# Altium PCB PCB1.PcbDoc (part 2 of 2)
Units mil, origin at the board's own origin, x right, y up, seen from the top; angles counter-clockwise.
Board outline 2920 x 2425 mil, 2 copper layers (Top Layer, Bottom Layer); 160 components, 43 nets, 660 pads, 172 vias.
Unrouted connection lines stored in the file: 5.
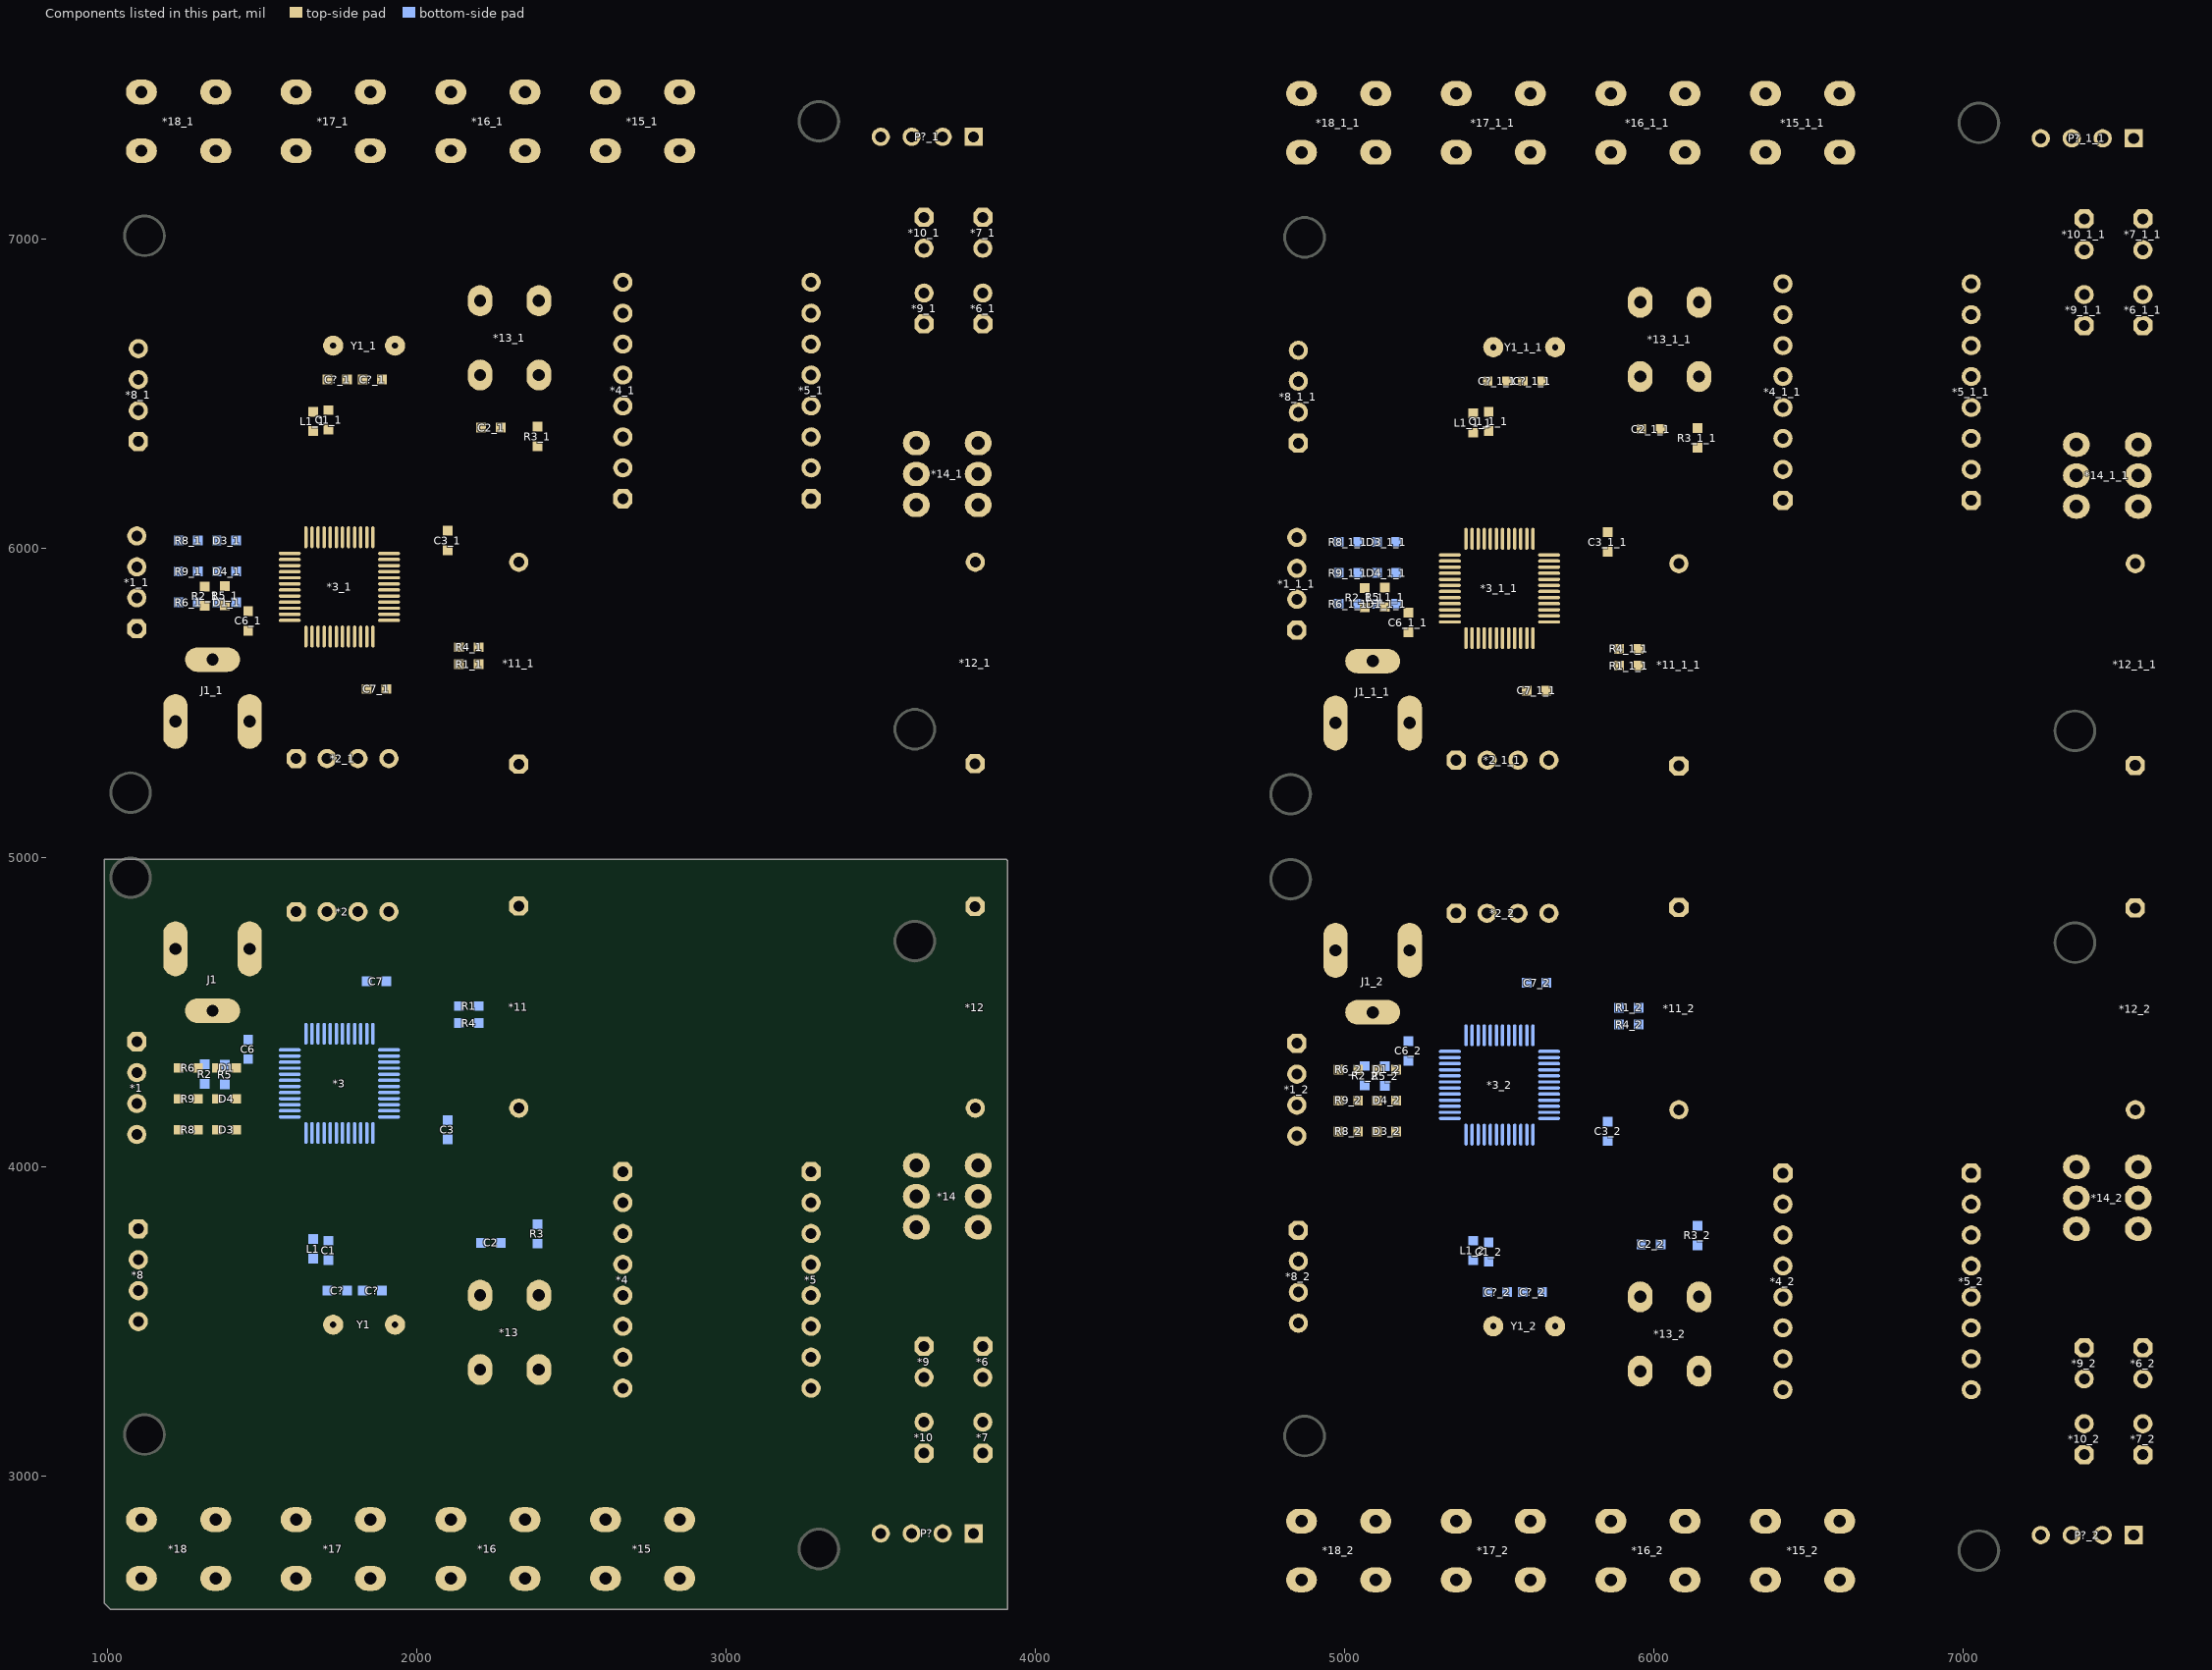
[diagram p2: the components of this part, seen from the top]

## Via types
v1: diameter 43.31, hole 17.72, Top Layer to Bottom Layer, 132 vias
v2: diameter 50, hole 28, Top Layer to Bottom Layer, 24 vias
v3: diameter 35.43, hole 17.72, Top Layer to Bottom Layer, 12 vias
v4: diameter 30.87, hole 17.72, Top Layer to Bottom Layer, 4 vias

## Nets (pads, with @x,y where several pads share a name; then routed paths per layer and width w, separated by ;. In a path a pad name is that pad's centre, name@x,y a point inside that pad or via, vN(x,y) a via of type N, cw(c..) or ccw(c..) an arc to the next point about the centre after c; other vN are vias at no path point) (continued)
pads on no net: *1_1.1 *1_1.2 *1_1.3 *1_1.4 *1_1_1.1 *1_1_1.2 *1_1_1.3 *1_1_1.4 *1_2.1 *1_2.2 *1_2.3 *1_2.4 *2_1.1 *2_1.2 *2_1.3 *2_1.4 *2_1_1.1 *2_1_1.2 *2_1_1.3 *2_1_1.4 *2_2.1 *2_2.2 *2_2.3 *2_2.4 *3.1 *3.2 *3.3 *3.4 *3.10 *3.11 *3.25 *3.26 *3.29 *3.32 *3.33 *3.38 *3_1.1 *3_1.2 *3_1.3 *3_1.4 *3_1.5 *3_1.6 *3_1.7 *3_1.8 *3_1.9 *3_1.10 *3_1.11 *3_1.12 *3_1.13 *3_1.14 *3_1.15 *3_1.16 *3_1.17 *3_1.18 *3_1.19 *3_1.20 *3_1.21 *3_1.22 *3_1.23 *3_1.24 *3_1.25 *3_1.26 *3_1.27 *3_1.28 *3_1.29 *3_1.30 *3_1.31 *3_1.32 *3_1.33 *3_1.34 *3_1.35 *3_1.36 *3_1.37 *3_1.38 *3_1.39 *3_1.40 *3_1.41 *3_1.42 *3_1.43 *3_1.44 *3_1.45 *3_1.46 *3_1.47 *3_1.48 *3_1_1.1 *3_1_1.2 *3_1_1.3 *3_1_1.4 *3_1_1.5 *3_1_1.6 *3_1_1.7 *3_1_1.8 *3_1_1.9 *3_1_1.10 *3_1_1.11 *3_1_1.12 *3_1_1.13 *3_1_1.14 *3_1_1.15 *3_1_1.16 *3_1_1.17 *3_1_1.18 *3_1_1.19 *3_1_1.20 *3_1_1.21 *3_1_1.22 *3_1_1.23 *3_1_1.24 *3_1_1.25 *3_1_1.26 *3_1_1.27 *3_1_1.28 *3_1_1.29 *3_1_1.30 *3_1_1.31 *3_1_1.32 *3_1_1.33 *3_1_1.34 *3_1_1.35 *3_1_1.36 *3_1_1.37 *3_1_1.38 *3_1_1.39 *3_1_1.40 *3_1_1.41 *3_1_1.42 *3_1_1.43 *3_1_1.44 *3_1_1.45 *3_1_1.46 *3_1_1.47 *3_1_1.48 *3_2.1 *3_2.2 *3_2.3 *3_2.4 *3_2.5 *3_2.6 *3_2.7 *3_2.8 *3_2.9 *3_2.10 *3_2.11 *3_2.12 *3_2.13 *3_2.14 *3_2.15 *3_2.16 *3_2.17 *3_2.18 *3_2.19 *3_2.20 *3_2.21 *3_2.22 *3_2.23 *3_2.24 *3_2.25 *3_2.26 *3_2.27 *3_2.28 *3_2.29 *3_2.30 *3_2.31 *3_2.32 *3_2.33 *3_2.34 *3_2.35 *3_2.36 *3_2.37 *3_2.38 *3_2.39 *3_2.40 *3_2.41 *3_2.42 *3_2.43 *3_2.44 *3_2.45 *3_2.46 *3_2.47 *3_2.48 *4_1.1 *4_1.2 *4_1.3 *4_1.4 *4_1.5 *4_1.6 *4_1.7 *4_1.8 *4_1_1.1 *4_1_1.2 *4_1_1.3 *4_1_1.4 *4_1_1.5 *4_1_1.6 *4_1_1.7 *4_1_1.8 *4_2.1 *4_2.2 *4_2.3 *4_2.4 *4_2.5 *4_2.6 *4_2.7 *4_2.8 *5_1.1 *5_1.2 *5_1.3 *5_1.4 *5_1.5 *5_1.6 *5_1.7 *5_1.8 *5_1_1.1 *5_1_1.2 *5_1_1.3 *5_1_1.4 *5_1_1.5 *5_1_1.6 *5_1_1.7 *5_1_1.8 *5_2.1 *5_2.2 *5_2.3 *5_2.4 *5_2.5 *5_2.6 *5_2.7 *5_2.8 *6_1.1 *6_1.2 *6_1_1.1 *6_1_1.2 *6_2.1 *6_2.2 *7_1.1 *7_1.2 *7_1_1.1 *7_1_1.2 *7_2.1 *7_2.2 *8_1.1 *8_1.2 *8_1.3 *8_1.4 *8_1_1.1 *8_1_1.2 *8_1_1.3 *8_1_1.4 *8_2.1 *8_2.2 *8_2.3 *8_2.4 *9_1.1 *9_1.2 *9_1_1.1 *9_1_1.2 *9_2.1 *9_2.2 *10_1.1 *10_1.2 *10_1_1.1 *10_1_1.2 *10_2.1 *10_2.2 *11_1.1 *11_1.2 *11_1_1.1 *11_1_1.2 *11_2.1 *11_2.2 *12_1.1 *12_1.2 *12_1_1.1 *12_1_1.2 *12_2.1 *12_2.2 *13_1.1 *13_1.2 *13_1_1.1 *13_1_1.2 *13_2.1 *13_2.2 *14.1 *14.2 *14.3 *14.4 *14_1.1 *14_1.2 *14_1.3 *14_1.4 *14_1.5 *14_1.6 *14_1_1.1 *14_1_1.2 *14_1_1.3 *14_1_1.4 *14_1_1.5 *14_1_1.6 *14_2.1 *14_2.2 *14_2.3 *14_2.4 *14_2.5 *14_2.6 *15_1.1 *15_1.2 *15_1_1.1 *15_1_1.2 *15_2.1 *15_2.2 *16_1.1 *16_1.2 *16_1_1.1 *16_1_1.2 *16_2.1 *16_2.2 *17_1.1 *17_1.2 *17_1_1.1 *17_1_1.2 *17_2.1 *17_2.2 *18_1.1 *18_1.2 *18_1_1.1 *18_1_1.2 *18_2.1 *18_2.2 C1_1.1 C1_1.2 C1_1_1.1 C1_1_1.2 C1_2.1 C1_2.2 C2_1.1 C2_1.2 C2_1_1.1 C2_1_1.2 C2_2.1 C2_2.2 C3_1.1 C3_1.2 C3_1_1.1 C3_1_1.2 C3_2.1 C3_2.2 C6_1.1 C6_1.2 C6_1_1.1 C6_1_1.2 C6_2.1 C6_2.2 C7_1.1 C7_1.2 C7_1_1.1 C7_1_1.2 C7_2.1 C7_2.2 C?_1.1 C?_1.2 C?_1_1.1 C?_1_1.2 C?_2.1 C?_2.2 D1_1.1 D1_1.2 D1_1_1.1 D1_1_1.2 D1_2.1 D1_2.2 D3_1.1 D3_1.2 D3_1_1.1 D3_1_1.2 D3_2.1 D3_2.2 D4_1.1 D4_1.2 D4_1_1.1 D4_1_1.2 D4_2.1 D4_2.2 J1_1.1 J1_1.2 J1_1.3 J1_1_1.1 J1_1_1.2 J1_1_1.3 J1_2.1 J1_2.2 J1_2.3 L1_1.1 L1_1.2 L1_1_1.1 L1_1_1.2 L1_2.1 L1_2.2 P?_1.1 P?_1.2 P?_1.3 P?_1.4 P?_1_1.1 P?_1_1.2 P?_1_1.3 P?_1_1.4 P?_2.1 P?_2.2 P?_2.3 P?_2.4 R1_1.1 R1_1.2 R1_1_1.1 R1_1_1.2 R1_2.1 R1_2.2 R2_1.1 R2_1.2 R2_1_1.1 R2_1_1.2 R2_2.1 R2_2.2 R3_1.1 R3_1.2 R3_1_1.1 R3_1_1.2 R3_2.1 R3_2.2 R4_1.1 R4_1.2 R4_1_1.1 R4_1_1.2 R4_2.1 R4_2.2 R5_1.1 R5_1.2 R5_1_1.1 R5_1_1.2 R5_2.1 R5_2.2 R6_1.1 R6_1.2 R6_1_1.1 R6_1_1.2 R6_2.1 R6_2.2 R8_1.1 R8_1.2 R8_1_1.1 R8_1_1.2 R8_2.1 R8_2.2 R9_1.1 R9_1.2 R9_1_1.1 R9_1_1.2 R9_2.1 R9_2.2 Y1_1.1 Y1_1.2 Y1_1_1.1 Y1_1_1.2 Y1_2.1 Y1_2.2
copper on no net: | length 201589.3
  Top Layer w10: 1095,5840 v1(1180,5755) ; 1095,5940 1095,5925 v1(1250,5770) ; 1100,6445 v2(1295,6445) ; 1100,6545 1105,6550 v2(1355,6550) ; 1245,5845 1350,5845 1380,5815 ; 1315,5876.5 1378.5,5876.5 1380,5877.99 1380,5870 1405,5845 1405.47,5845.47 1589.55,5845.47 ; 1350,7285 1350,7270 1450,7170 1450,5950 1495.16,5904.84 1505.47,5904.84 ; v1(1410,5975) 1410,5960 1416.5,5953.5 1426.9,5943.1 1426.9,5940.43 1482.18,5885.16 1485.16,5885.16 ; v1(1440,5880) 1454.84,5865.16 1589.55,5865.16 ; 1455,5737.01 1484.72,5766.73 1589.55,5766.73 ; 1455,5800 1468.58,5786.42 1589.55,5786.42 ; 1485.16,5884.84 1589.55,5884.84 ; 1505.47,5904.53 1589.55,5904.53 ; v4(1510,5815) 1520.79,5825.79 1589.55,5825.79 ; 1526.42,5963.58 1589.55,5963.58 ; 1526.42,5963.9 1525.33,5963.9 1515,5974.23 1515,7125 1565,7175 2500,7175 2610,7285 ; 1560,6012.82 1589.55,5983.27 ; 1589.55,5924.21 1500.79,5924.21 1475,5953.28 1475,7175 1585,7285 1610,7285 ; 1589.55,5943.9 1517.05,5943.9 1495,5965.95 1495,7140 1560,7205 2030,7205 2110,7285 ; 1605,6140 1640.92,6104.08 1640.92,6035.45 ; 1610,5320 1681.1,5391.1 1681.1,5714.55 ; 1675,6372.01 1665,6362.01 1665,6203.16 1694.82,6173.35 1694.94,6173.35 1698.28,6170 1700.79,6167.5 1700.79,6035.45 1700.79,6026.24 ; 1700.79,5714.55 1700.79,5329.21 1710,5320 ; v1(1710,6210) 1710,6195 1710.05,6194.95 1719.98,6185.08 1720.47,6035.45 ; 1730,6655 1765,6655 1796.65,6623.35 1796.65,6569.36 1794.25,6566.96 1794.25,6555.98 1794.25,6523.04 1796.65,6520.64 1796.65,6311.65 1765.7,6280.7 1765.7,6249.3 1775,6240 1775,6175 1760.16,6160.16 1760.16,6159.84 ; v3(1740.16,5600) 1740.16,5714.55 ; 1740.16,6035.45 1740.16,6170.16 1750,6180 1750,6235.16 1740.16,6245 1740.16,6290.16 1760,6310 v1(1760,6335) ; 1759.84,5714.55 1759.84,5650.16 v3(1770,5640) ; 1759.84,6035.45 1759.84,6159.84 ; 1779.53,6035.45 1779.53,6144.53 ; 1779.84,6144.53 1779.84,6144.84 1795,6160 1795,6248.28 1785.7,6257.58 1785.7,6272.42 1816.65,6303.37 1816.65,6631.65 1840,6655 1930,6655 ; v3(1805,5605) 1818.9,5618.9 1818.9,5714.55 ; 1838.5,5545 1838.58,5545.08 1838.58,5714.55 ; 1858.27,5714.55 1858.27,5588.23 1901.5,5545 ; v1(1865,6260) 1870,6255 v1(1870,6110) ; 1910.45,5766.73 1998.27,5766.73 2000,5765 v1(2065.08,5763.58) ; 1910.45,5806.1 2486.1,5806.1 2620,5940 2621.1,5941.1 2621.1,6114.72 2666.38,6160 ; 1910.45,5825.79 2460.79,5825.79 2590,5955 2590,6235 2615,6260 2666.38,6260 ; 1910.45,5845.47 2425.47,5845.47 2565,5985 2565,6335 2590,6360 2666.38,6360 ; 1910.45,5865.16 2390.16,5865.16 2535,6010 2535,6405 2590,6460 2666.38,6460 ; 1910.45,5884.84 2364.84,5884.84 2505,6025 2505,6500 2565,6560 2666.38,6560 ; 1910.45,5904.53 2156.97,5904.53 2157.44,5905 2178.5,5905 2203.5,5930 v1(2225,5930) ; 1910.45,5924.21 2129.21,5924.21 ; 1910.45,5943.9 2133.9,5943.9 ; 1910.45,5963.58 2065.08,5963.58 2095,5993.5 ; 1910.45,5983.27 2021.77,5983.27 2095,6056.5 ; v1(2055,6295) 2060,6295 2075,6280 v1(2075,6105) ; 2129.21,5924.53 2148.68,5924.53 2149.16,5925 2150,5925 2480,6255 2480,6570 2570,6660 2666.38,6660 ; 2133.9,5944.53 2134.53,5944.53 2460,6270 2460,6690 2530,6760 2666.38,6760 ; 2200,5625 2200,5680 v1(2200,5725) ; v1(2270,6335) 2271.5,6336.5 2271.5,6390 2387.01,6390 2390,6392.99 2390,6555 2395,6560 ; 4845,5835 v1(4930,5750) ; 4845,5935 4845,5920 v1(5000,5765) ; 4850,6440 v2(5045,6440) ; 4850,6540 4855,6545 v2(5105,6545) ; v1(4930,4385) 4932.5,4385 4957.5,4410 5230,4410 5360,4540 v3(5490.16,4540) ; 4995,5840 5100,5840 5130,5810 ; v1(5000,4370) 5020,4390 5250,4390 5360,4500 v3(5520,4500) ; 5042.99,4115 5103.5,4115 ; 5042.99,4215 5103.5,4215 ; 5042.99,4315 5103.5,4315 ; v2(5045,3695) 5045,3835 5090,3880 v1(5615,3880) ; 5065,5871.5 5128.5,5871.5 5130,5872.99 5130,5865 5155,5840 5155.47,5840.47 5339.55,5840.47 ; 5100,7280 5100,7265 5200,7165 5200,5945 5245.16,5899.84 5255.47,5899.84 ; v2(5105,3590) 5105,3800 5150,3845 v1(5805,3845) ; v1(5160,5970) 5160,5955 5166.5,5948.5 5176.9,5938.1 5176.9,5935.43 5232.18,5880.16 5235.16,5880.16 ; 5166.5,4115 5160,4121.5 v1(5160,4165) 5162.5,4165 v1@5166.5,4169 ; 5166.5,4215 5166.5,4246.5 v1@5180,4260 ; 5166.5,4315 5240,4315 v4@5250,4325 ; v1(5190,5875) 5204.84,5860.16 5339.55,5860.16 ; 5205,5732.01 5234.72,5761.73 5339.55,5761.73 ; 5205,5795 5218.58,5781.42 5339.55,5781.42 ; 5235.16,5879.84 5339.55,5879.84 ; 5255.47,5899.53 5339.55,5899.53 ; v4(5260,5810) 5270.79,5820.79 5339.55,5820.79 ; 5276.42,5958.58 5339.55,5958.58 ; 5276.42,5958.9 5275.33,5958.9 5265,5969.23 5265,7120 5315,7170 6250,7170 6360,7280 ; 5310,6007.82 5339.55,5978.27 ; 5339.55,5919.21 5250.79,5919.21 5225,5948.28 5225,7170 5335,7280 5360,7280 ; 5339.55,5938.9 5267.05,5938.9 5245,5960.95 5245,7135 5310,7200 5780,7200 5860,7280 ; 5355,6135 5390.92,6099.08 5390.92,6030.45 ; 5360,5315 5431.1,5386.1 5431.1,5709.55 ; 5425,6367.01 5415,6357.01 5415,6198.16 5444.82,6168.35 5444.94,6168.35 5448.28,6165 5450.79,6162.5 5450.79,6030.45 5450.79,6021.24 ; 5450.79,5709.55 5450.79,5324.21 5460,5315 ; v1(5460,6205) 5460,6190 5460.05,6189.95 5469.98,6180.08 5470.47,6030.45 ; 5480,6650 5515,6650 5546.65,6618.35 5546.65,6564.36 5544.25,6561.96 5544.25,6550.98 5544.25,6518.04 5546.65,6515.64 5546.65,6306.65 5515.7,6275.7 5515.7,6244.3 5525,6235 5525,6170 5510.16,6155.16 5510.16,6154.84 ; v3(5490.16,5595) 5490.16,5709.55 ; 5490.16,6030.45 5490.16,6165.16 5500,6175 5500,6230.16 5490.16,6240 5490.16,6285.16 5510,6305 v1(5510,6330) ; 5509.84,5709.55 5509.84,5645.16 v3(5520,5635) ; 5509.84,6030.45 5509.84,6154.84 ; v1(5510,3805) v1(6020,3805) ; 5529.53,6030.45 5529.53,6139.53 ; 5529.84,6139.53 5529.84,6139.84 5545,6155 5545,6243.28 5535.7,6252.58 5535.7,6267.42 5566.65,6298.37 5566.65,6626.65 5590,6650 5680,6650 ; v3(5555,4535) 5580,4535 5620,4495 v1(5620,4030) ; v3(5555,5600) 5568.9,5613.9 5568.9,5709.55 ; 5588.5,5540 5588.58,5540.08 5588.58,5709.55 ; 5608.27,5709.55 5608.27,5583.23 5651.5,5540 ; v1(5615,6255) 5620,6250 v1(5620,6105) ; 5660.45,5761.73 5748.27,5761.73 5750,5760 v1(5815.08,5758.58) ; 5660.45,5801.1 6236.1,5801.1 6370,5935 6371.1,5936.1 6371.1,6109.72 6416.38,6155 ; 5660.45,5820.79 6210.79,5820.79 6340,5950 6340,6230 6365,6255 6416.38,6255 ; 5660.45,5840.47 6175.47,5840.47 6315,5980 6315,6330 6340,6355 6416.38,6355 ; 5660.45,5860.16 6140.16,5860.16 6285,6005 6285,6400 6340,6455 6416.38,6455 ; 5660.45,5879.84 6114.84,5879.84 6255,6020 6255,6495 6315,6555 6416.38,6555 ; 5660.45,5899.53 5906.97,5899.53 5907.44,5900 5928.5,5900 5953.5,5925 v1(5975,5925) ; 5660.45,5919.21 5879.21,5919.21 ; 5660.45,5938.9 5883.9,5938.9 ; 5660.45,5958.58 5815.08,5958.58 5845,5988.5 ; 5660.45,5978.27 5771.77,5978.27 5845,6051.5 ; v1(5805,6290) 5810,6290 5825,6275 v1(5825,6100) ; v1(5815.08,4376.42) 5825,4366.5 v1(5825,4035) ; 5879.21,5919.53 5898.68,5919.53 5899.16,5920 5900,5920 6230,6250 6230,6565 6320,6655 6416.38,6655 ; 5883.9,5939.53 5884.53,5939.53 6210,6265 6210,6685 6280,6755 6416.38,6755 ; v1@5950,4420 v1(5950,4415) 5975,4390 v1(5975,4210) ; 5950,5620 5950,5675 v1(5950,5720) ; v1(6020,6330) 6021.5,6331.5 6021.5,6385 6137.01,6385 6140,6387.99 6140,6550 6145,6555
  Top Layer w20: 1095,5740 1135.63,5699.37 1315,5699.37 ; 1095,6040 1165,6040 1170,6045 ; 1100,6345 1210,6345 1230,6325 v1(1230,6135) ; v1@1170,6135 1170,6045 ; 1245,5845 1170,5920 1170,6045 ; 1315,5813.5 1315,5699.37 ; 1380,5815 1398.5,5796.5 1455,5796.5 ; 1455,5737.01 1417.36,5699.37 ; v1(1465,5685) 1450.63,5699.37 1417.36,5699.37 ; v1(1690,6485) 1690,6435 1718.5,6435 1720,6436.5 ; 1712.01,6545 1765,6492.01 1765,6395 1746.65,6376.65 1723.15,6376.65 1720,6373.5 ; v1(1780,5555) 1780,5350 1810,5320 ; v1(2010,6410) v1(2010,6056.5) 2095,6056.5 2100,6056.5 ; 2100,5993.5 2166.5,6060 v1(2165,6065) ; 2125,5560 2137.01,5572.01 2137.01,5625 ; v1(2130,6165) 2305,6165 2390,6250 2390,6330 ; 4845,5735 4885.63,5694.37 5065,5694.37 ; 4845,6035 4915,6035 4920,6040 ; 4850,6340 4960,6340 4980,6320 v1(4980,6130) ; v1@4920,6130 4920,6040 ; 4980,4315 4980,4215 4980,4115 4980,4010 5010,3980 5765,3980 5875,3980 v1(5880,3975) ; 4995,5840 4920,5915 4920,6040 ; 5065,5808.5 5065,5694.37 ; 5130,5810 5148.5,5791.5 5205,5791.5 ; 5205,5732.01 5167.36,5694.37 ; v1(5215,4455) 5345,4585 v1(5530,4585) 5760,4585 v2(5765,4580) ; v1(5215,5680) 5200.63,5694.37 5167.36,5694.37 ; v1(5440,3655) 5685,3655 v1(5760,3730) ; v1(5440,6480) 5440,6430 5468.5,6430 5470,6431.5 ; 5462.01,6540 5515,6487.01 5515,6390 5496.65,6371.65 5473.15,6371.65 5470,6368.5 ; v1(5530,5550) 5530,5345 5560,5315 ; v1(5760,6405) v1(5760,6051.5) 5845,6051.5 5850,6051.5 ; 5850,5988.5 5916.5,6055 v1(5915,6060) ; 5875,5555 5887.01,5567.01 5887.01,5620 ; v1(5880,6160) 6055,6160 6140,6245 6140,6325 ; 1315,5699.37 1417.36,5699.37 ; 5065,5694.37 5167.36,5694.37
  Top Layer w25: 1100,6645 v1(1190,6645) ; 1110,7475 1350,7475 1610,7475 1850,7475 2110,7475 2350,7475 2610,7475 2850,7475 3640,7475 3700,7415 3700,7330 ; 1560,6012.82 1560,7085 1610,7135 3430,7135 3500,7205 3500,7330 ; 1605,6140 1605,7070 1625,7090 3490,7090 3600,7200 3600,7330 ; v1(1710,6210) 1710,6363.5 1720,6373.5 ; 1838.5,5545 1840,5543.5 v1(1840,5485) ; 1887.99,6545 1887.99,6523.5 1910,6501.5 v1(1910,6215) ; 1901.5,5545 2000,5545 v2(2015,5560) ; 1910,5320 v1@1910,5480 ; v1@2075,5680 2137.01,5680 ; 2205,6800 2208.5,6796.5 2208.5,6390 v1@2208.5,6213.5 ; v1(3185,7515) 3430,7520 3750,7520 3800,7470 3800,7330 ; 3275,6460 3276.87,6461.87 3669.42,6461.87 3671.29,6460 3740,6460 3830,6550 3830,6725 ; 3275,6560 3670,6560 3740,6630 3740,7030 3780,7070 3830,7070 ; 3275,6660 3575,6660 3640,6725 ; 3275,6760 3520,6760 3545,6785 3545,7030 3585,7070 3640,7070 ; 3640,6825 3640,6970 ; 3830,6825 3830,6970 ; 4850,6640 v1(4940,6640) ; 4860,7470 5100,7470 5360,7470 5600,7470 5860,7470 6100,7470 6360,7470 6600,7470 7390,7470 7450,7410 7450,7325 ; v1(4925,4005) 4925,3935 ; v1(4940,3495) 4925,3510 4925,3935 ; 5310,6007.82 5310,7080 5360,7130 7180,7130 7250,7200 7250,7325 ; 5355,6135 5355,7065 5375,7085 7240,7085 7350,7195 7350,7325 ; v1(5460,6205) 5460,6358.5 5470,6368.5 ; 5588.5,5540 5590,5538.5 v1(5590,5480) ; 5637.99,6540 5637.99,6518.5 5660,6496.5 v1(5660,6210) ; 5651.5,5540 5750,5540 v2(5765,5555) ; 5660,5315 v1@5660,5475 ; 5765,3980 v2(5765,4580) ; v1(5825,4455) 5825,4655 ; v1@5825,5675 5887.01,5675 ; v1(5915,4075) 5925,4065 6080,4065 ; 5955,6795 5958.5,6791.5 5958.5,6385 v1@5958.5,6208.5 ; 6080,4185 6080,4065 ; v1(6935,7510) 7180,7515 7500,7515 7550,7465 7550,7325 ; 7025,6455 7026.87,6456.87 7419.42,6456.87 7421.29,6455 7490,6455 7580,6545 7580,6720 ; 7025,6555 7420,6555 7490,6625 7490,7025 7530,7065 7580,7065 ; 7025,6655 7325,6655 7390,6720 ; 7025,6755 7270,6755 7295,6780 7295,7025 7335,7065 7390,7065 ; 7390,6820 7390,6965 ; 7580,6820 7580,6965 ; 4925,3935 4930,3930 v1(5460,3930) v1(5955,3930) 6030,3930 6080,3980 6080,4065
  Top Layer w50: 1220,5440 1220,5520 1340,5640 ; 2330,5301.69 3230,5301.69 3445,5516.69 3445,6220 ; 2666.38,6860 v2(3105,6860) 3275,6860 ; v2(3105,6360) 3275,6360 3380,6360 3434.37,6414.37 3649.74,6414.37 3725,6339.11 3725,6035.47 3805.47,5955 ; v1@3187.5,6247.5 3155,6215 3155,5615 3100,5560 2125,5560 v2(2015,5560) 2015,5295 2095,5215 3716.73,5215 3805,5303.27 ; v1@3200,6260 3275,6260 ; 3275,6160 3385,6160 3445,6220 ; 3615,6240 3465,6240 3445,6220 ; 4970,5435 4970,5515 5090,5635 ; 5090,4500 5090,4510 5095,4515 5194.88,4515 5334.88,4655 v1(5590,4655) v1(5660,4655) 5825,4655 6115,4655 ; 5210,4700 5240,4730 7055,4730 7365,4420 7365,4000 ; 6080,4185 6080,4620 6115,4655 ; 6080,5296.69 6980,5296.69 7195,5511.69 7195,6215 ; 6416.38,6855 v2(6855,6855) 7025,6855 ; v1(6855,2670) v2(6855,3280) v1(6855,3775) v2(6855,3780) 6855,4575 6775,4655 6155,4655 6115,4655 ; v2(6855,6355) 7025,6355 7130,6355 7184.37,6409.37 7399.74,6409.37 7475,6334.11 7475,6030.47 7555.47,5950 ; v1(6935,2625) v1(6935,3895) ; v2@6937.5,6242.5 6905,6210 6905,5610 6850,5555 5875,5555 v2(5765,5555) 5765,5290 5845,5210 7466.73,5210 7555,5298.27 ; v2@6950,6255 7025,6255 ; 7025,6155 7135,6155 7195,6215 ; 7365,6235 7215,6235 7195,6215
  Bottom Layer w10: v1(1180,5755) 1182.5,5755 1207.5,5730 1480,5730 1610,5600 v3(1740.16,5600) ; v1(1250,5770) 1270,5750 1500,5750 1610,5640 v3(1770,5640) ; 1292.99,5825 1353.5,5825 ; 1292.99,5925 1353.5,5925 ; 1292.99,6025 1353.5,6025 ; v2(1295,6445) 1295,6305 1340,6260 v1(1865,6260) ; v2(1355,6550) 1355,6340 1400,6295 v1(2055,6295) ; 1416.5,5825 1490,5825 v4@1500,5815 ; 1416.5,5925 1416.5,5893.5 v1@1430,5880 ; v1@1416.5,5971 1412.5,5975 v1(1410,5975) 1410,6018.5 1416.5,6025 ; v1(1760,6335) v1(2270,6335) ; v3(1805,5605) 1830,5605 1870,5645 v1(1870,6110) ; v1(2065.08,5763.58) 2075,5773.5 v1(2075,6105) ; v1@2200,5720 v1(2200,5725) 2225,5750 v1(2225,5930) ; 4845,4200 4845,4215 v1(5000,4370) ; 4845,4300 v1(4930,4385) ; 4850,3595 4855,3590 v2(5105,3590) ; 4850,3695 v2(5045,3695) ; v1(4930,5750) 4932.5,5750 4957.5,5725 5230,5725 5360,5595 v3(5490.16,5595) ; 4995,4295 5100,4295 5130,4325 ; v1(5000,5765) 5020,5745 5250,5745 5360,5635 v3(5520,5635) ; 5042.99,5820 5103.5,5820 ; 5042.99,5920 5103.5,5920 ; 5042.99,6020 5103.5,6020 ; v2(5045,6440) 5045,6300 5090,6255 v1(5615,6255) ; 5065,4263.5 5128.5,4263.5 5130,4262.01 5130,4270 5155,4295 5155.47,4294.53 5339.55,4294.53 ; 5100,2855 5100,2870 5200,2970 5200,4190 5245.16,4235.16 5255.47,4235.16 ; v2(5105,6545) 5105,6335 5150,6290 v1(5805,6290) ; v1(5160,4165) 5160,4180 5166.5,4186.5 5176.9,4196.9 5176.9,4199.57 5232.18,4254.84 5235.16,4254.84 ; 5166.5,5820 5240,5820 v4@5250,5810 ; 5166.5,5920 5166.5,5888.5 v1@5180,5875 ; v1@5166.5,5966 5162.5,5970 v1(5160,5970) 5160,6013.5 5166.5,6020 ; v1(5190,4260) 5204.84,4274.84 5339.55,4274.84 ; 5205,4340 5218.58,4353.58 5339.55,4353.58 ; 5205,4402.99 5234.72,4373.27 5339.55,4373.27 ; 5235.16,4255.16 5339.55,4255.16 ; 5255.47,4235.47 5339.55,4235.47 ; v4(5260,4325) 5270.79,4314.21 5339.55,4314.21 ; 5276.42,4176.1 5275.33,4176.1 5265,4165.77 5265,3015 5315,2965 6250,2965 6360,2855 ; 5276.42,4176.42 5339.55,4176.42 ; 5310,4127.18 5339.55,4156.73 ; 5339.55,4196.1 5267.05,4196.1 5245,4174.05 5245,3000 5310,2935 5780,2935 5860,2855 ; 5339.55,4215.79 5250.79,4215.79 5225,4186.72 5225,2965 5335,2855 5360,2855 ; 5355,4000 5390.92,4035.92 5390.92,4104.55 ; 5360,4820 5431.1,4748.9 5431.1,4425.45 ; 5425,3767.99 5415,3777.99 5415,3936.84 5444.82,3966.65 5444.94,3966.65 5448.28,3970 5450.79,3972.5 5450.79,4104.55 5450.79,4113.76 ; 5450.79,4425.45 5450.79,4810.79 5460,4820 ; v1(5460,3930) 5460,3945 5460.05,3945.05 5469.98,3954.92 5470.47,4104.55 ; 5480,3485 5515,3485 5546.65,3516.65 5546.65,3570.64 5544.25,3573.04 5544.25,3584.02 5544.25,3616.96 5546.65,3619.36 5546.65,3828.35 5515.7,3859.3 5515.7,3890.7 5525,3900 5525,3965 5510.16,3979.84 5510.16,3980.16 ; 5490.16,4104.55 5490.16,3969.84 5500,3960 5500,3904.84 5490.16,3895 5490.16,3849.84 5510,3830 v1(5510,3805) ; 5490.16,4425.45 v3(5490.16,4540) ; 5509.84,3980.16 5509.84,4104.55 ; 5509.84,4425.45 5509.84,4489.84 v3(5520,4500) ; v1(5510,6330) v1(6020,6330) ; 5529.53,3995.47 5529.53,4104.55 ; 5529.84,3995.47 5529.84,3995.16 5545,3980 5545,3891.72 5535.7,3882.42 5535.7,3867.58 5566.65,3836.63 5566.65,3508.35 5590,3485 5680,3485 ; v3(5555,4535) 5568.9,4521.1 5568.9,4425.45 ; v3(5555,5600) 5580,5600 5620,5640 v1(5620,6105) ; 5588.5,4595 5588.58,4594.92 5588.58,4425.45 ; 5608.27,4425.45 5608.27,4551.77 5651.5,4595 ; v1(5615,3880) 5620,3885 v1(5620,4030) ; 5660.45,4156.73 5771.77,4156.73 5845,4083.5 ; 5660.45,4176.42 5815.08,4176.42 5845,4146.5 ; 5660.45,4196.1 5883.9,4196.1 ; 5660.45,4215.79 5879.21,4215.79 ; 5660.45,4235.47 5906.97,4235.47 5907.44,4235 5928.5,4235 5953.5,4210 v1(5975,4210) ; 5660.45,4255.16 6114.84,4255.16 6255,4115 6255,3640 6315,3580 6416.38,3580 ; 5660.45,4274.84 6140.16,4274.84 6285,4130 6285,3735 6340,3680 6416.38,3680 ; 5660.45,4294.53 6175.47,4294.53 6315,4155 6315,3805 6340,3780 6416.38,3780 ; 5660.45,4314.21 6210.79,4314.21 6340,4185 6340,3905 6365,3880 6416.38,3880 ; 5660.45,4333.9 6236.1,4333.9 6370,4200 6371.1,4198.9 6371.1,4025.28 6416.38,3980 ; 5660.45,4373.27 5748.27,4373.27 5750,4375 v1(5815.08,4376.42) ; v1(5805,3845) 5810,3845 5825,3860 v1(5825,4035) ; v1(5815.08,5758.58) 5825,5768.5 v1(5825,6100) ; 5879.21,4215.47 5898.68,4215.47 5899.16,4215 5900,4215 6230,3885 6230,3570 6320,3480 6416.38,3480 ; 5883.9,4195.47 5884.53,4195.47 6210,3870 6210,3450 6280,3380 6416.38,3380 ; v1(5950,4415) 5950,4460 5950,4515 ; v1@5950,5715 v1(5950,5720) 5975,5745 v1(5975,5925) ; v1(6020,3805) 6021.5,3803.5 6021.5,3750 6137.01,3750 6140,3747.01 6140,3585 6145,3580
  Bottom Layer w20: 1230,5825 1230,5925 1230,6025 1230,6130 1260,6160 2015,6160 2125,6160 v1(2130,6165) ; v1(1465,5685) 1595,5555 v1(1780,5555) 2010,5555 v2(2015,5560) ; v1(1690,6485) 1935,6485 v1(2010,6410) ; 4845,4100 4915,4100 4920,4095 ; 4845,4400 4885.63,4440.63 5065,4440.63 ; 4850,3795 4960,3795 4980,3815 v1(4980,4005) ; v1@4920,4005 4920,4095 ; 4980,5820 4980,5920 4980,6020 4980,6125 5010,6155 5765,6155 5875,6155 v1(5880,6160) ; 4995,4295 4920,4220 4920,4095 ; 5065,4326.5 5065,4440.63 ; 5130,4325 5148.5,4343.5 5205,4343.5 ; 5205,4402.99 5167.36,4440.63 ; v1(5215,4455) 5200.63,4440.63 5167.36,4440.63 ; v1(5215,5680) 5345,5550 v1(5530,5550) 5760,5550 v2(5765,5555) ; v1(5440,3655) 5440,3705 5468.5,3705 5470,3703.5 ; v1(5440,6480) 5685,6480 v1(5760,6405) ; 5462.01,3595 5515,3647.99 5515,3745 5496.65,3763.35 5473.15,3763.35 5470,3766.5 ; v1(5530,4585) 5530,4790 5560,4820 ; v1(5760,3730) v1(5760,4083.5) 5845,4083.5 5850,4083.5 ; 5850,4146.5 5916.5,4080 v1(5915,4075) ; 5875,4580 5887.01,4567.99 5887.01,4515 ; v1(5880,3975) 6055,3975 6140,3890 6140,3810 ; 5065,4440.63 5167.36,4440.63
  Bottom Layer w25: v1(1175,6135) 1175,6205 ; v1(1190,6645) 1175,6630 1175,6205 ; v2(2015,5560) 2015,6160 ; 2075,5485 v1(2075,5685) ; v1(2165,6065) 2175,6075 2330,6075 ; 2330,5955 2330,6075 ; 4850,3495 v1(4940,3495) ; 4860,2665 5100,2665 5360,2665 5600,2665 5860,2665 6100,2665 6360,2665 6600,2665 7390,2665 7450,2725 7450,2810 ; v1(4925,6130) 4925,6200 ; v1(4940,6640) 4925,6625 4925,6200 ; 5310,4127.18 5310,3055 5360,3005 7180,3005 7250,2935 7250,2810 ; 5355,4000 5355,3070 5375,3050 7240,3050 7350,2940 7350,2810 ; v1(5460,3930) 5460,3776.5 5470,3766.5 ; 5588.5,4595 5590,4596.5 v1(5590,4655) ; 5637.99,3595 5637.99,3616.5 5660,3638.5 v1(5660,3925) ; 5651.5,4595 5750,4595 v2(5765,4580) ; v1@5660,4660 5660,4820 ; v2(5765,5555) 5765,6155 ; v1@5825,4460 5887.01,4460 ; 5825,5480 v1(5825,5680) ; v1(5915,6060) 5925,6070 6080,6070 ; 5955,3340 5958.5,3343.5 5958.5,3750 v1@5958.5,3926.5 ; 6080,5950 6080,6070 ; v1(6935,2625) 7180,2620 7500,2620 7550,2670 7550,2810 ; 7025,3380 7270,3380 7295,3355 7295,3110 7335,3070 7390,3070 ; 7025,3480 7325,3480 7390,3415 ; 7025,3580 7420,3580 7490,3510 7490,3110 7530,3070 7580,3070 ; 7025,3680 7026.87,3678.13 7419.42,3678.13 7421.29,3680 7490,3680 7580,3590 7580,3415 ; 7390,3170 7390,3315 ; 7580,3170 7580,3315 ; 1175,6205 1180,6210 v1(1710,6210) v1(2205,6210) 2280,6210 2330,6160 2330,6075 ; 4925,6200 4930,6205 v1(5460,6205) v1(5955,6205) 6030,6205 6080,6155 6080,6070
  Bottom Layer w50: 1340,5640 1340,5630 1345,5625 1444.88,5625 1584.88,5485 v1(1840,5485) v1(1910,5485) 2075,5485 2365,5485 ; 1460,5440 1490,5410 3305,5410 3615,5720 3615,6140 ; 2330,5955 2330,5520 2365,5485 ; v1(3105,7470) v2(3105,6860) v1(3105,6365) v2(3105,6360) 3105,5565 3025,5485 2405,5485 2365,5485 ; v1(3185,6245) v1(3185,7515) ; 4970,4700 4970,4620 5090,4500 ; 5090,5635 5090,5625 5095,5620 5194.88,5620 5334.88,5480 v1(5590,5480) v1(5660,5480) 5825,5480 6115,5480 ; 5210,5435 5240,5405 7055,5405 7365,5715 7365,6135 ; 6080,4838.31 6980,4838.31 7195,4623.31 7195,3920 ; 6080,5950 6080,5515 6115,5480 ; 6416.38,3280 v2(6855,3280) 7025,3280 ; v2(6855,3780) 7025,3780 7130,3780 7184.37,3725.63 7399.74,3725.63 7475,3800.89 7475,4104.53 7555.47,4185 ; v1(6855,7465) v2(6855,6855) v1(6855,6360) v2(6855,6355) 6855,5560 6775,5480 6155,5480 6115,5480 ; v1(6935,6240) v1(6935,7510) ; v1@6937.5,3892.5 6905,3925 6905,4525 6850,4580 5875,4580 v2(5765,4580) 5765,4845 5845,4925 7466.73,4925 7555,4836.73 ; v1@6950,3880 7025,3880 ; 7025,3980 7135,3980 7195,3920 ; 7365,3900 7215,3900 7195,3920
  other v2: 6935,3890 6935,6245 3185,6250

## Keep-outs
Keep-Out Layer:
  lines w10: 990,2590 990,4995 3905,4995 3910,4990 3910,2570 1010,2570 990,2590 ; 990,5150 3905,5150 3910,5155 3910,7575 1010,7575 990,7555 990,5150 ; 4740,2585 4760,2565 7660,2565 7660,4985 7655,4990 4740,4990 4740,2585 ; 4740,5145 4740,7550 4760,7570 7660,7570 7660,5150 7655,5145 4740,5145

## Other copper
Bottom Layer:
  text "by  zehn" at 5855,3150 h90
  text "by  zehn" at 2100,3145 h90